# Altium PCB Panel_2020.PcbDoc
Units mm, origin at the board's own origin, x right, y up, seen from the top; angles counter-clockwise.
Board outline 100 x 189.5 mm, 4 copper layers (Top Copper, Ground Plane, Power Plane, Bottom Copper), stack 1.57 mm thick; 1 components, 344 nets, 217 pads, 0 vias.
Unrouted connection lines stored in the file: 145.
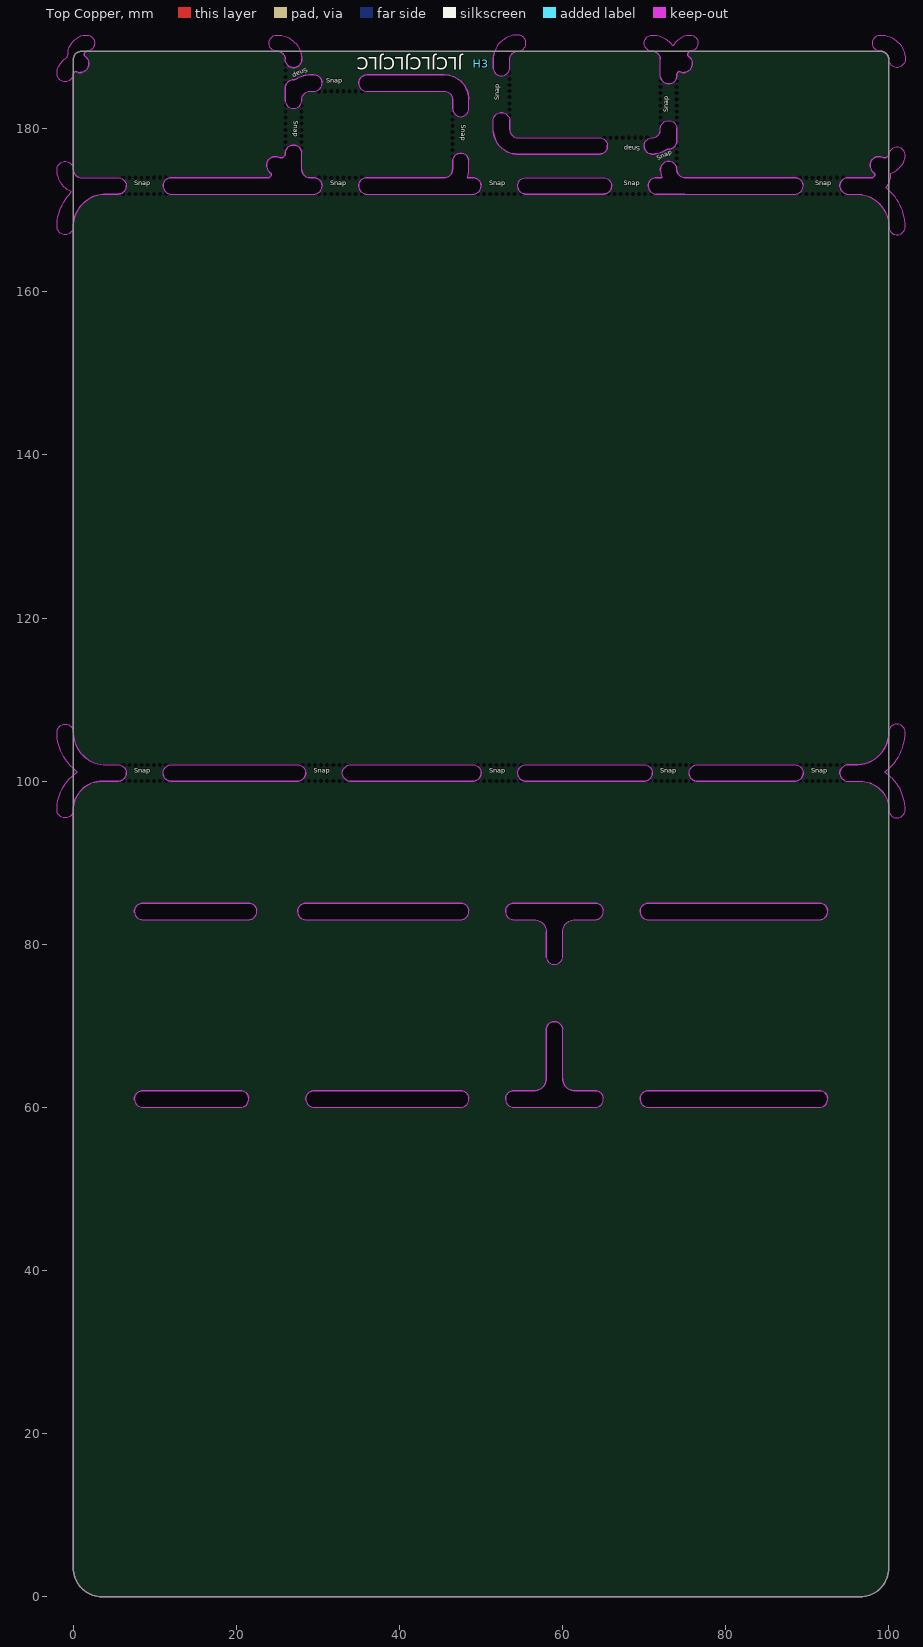
[diagram p0: Top Copper view]
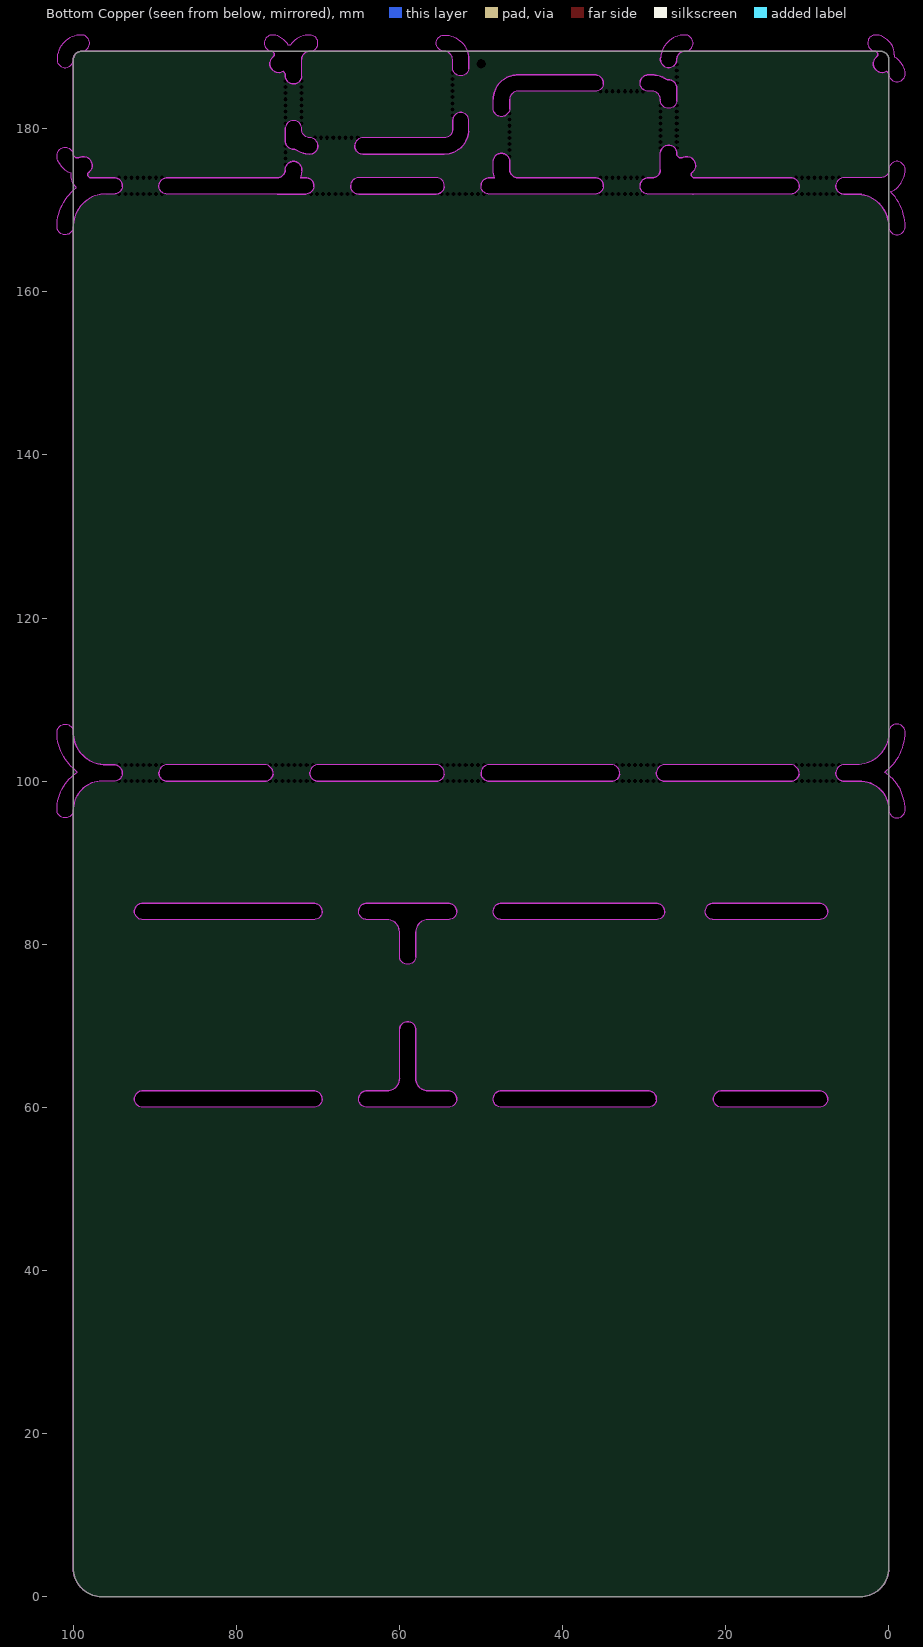
[diagram p1: Bottom Copper view, seen from below]
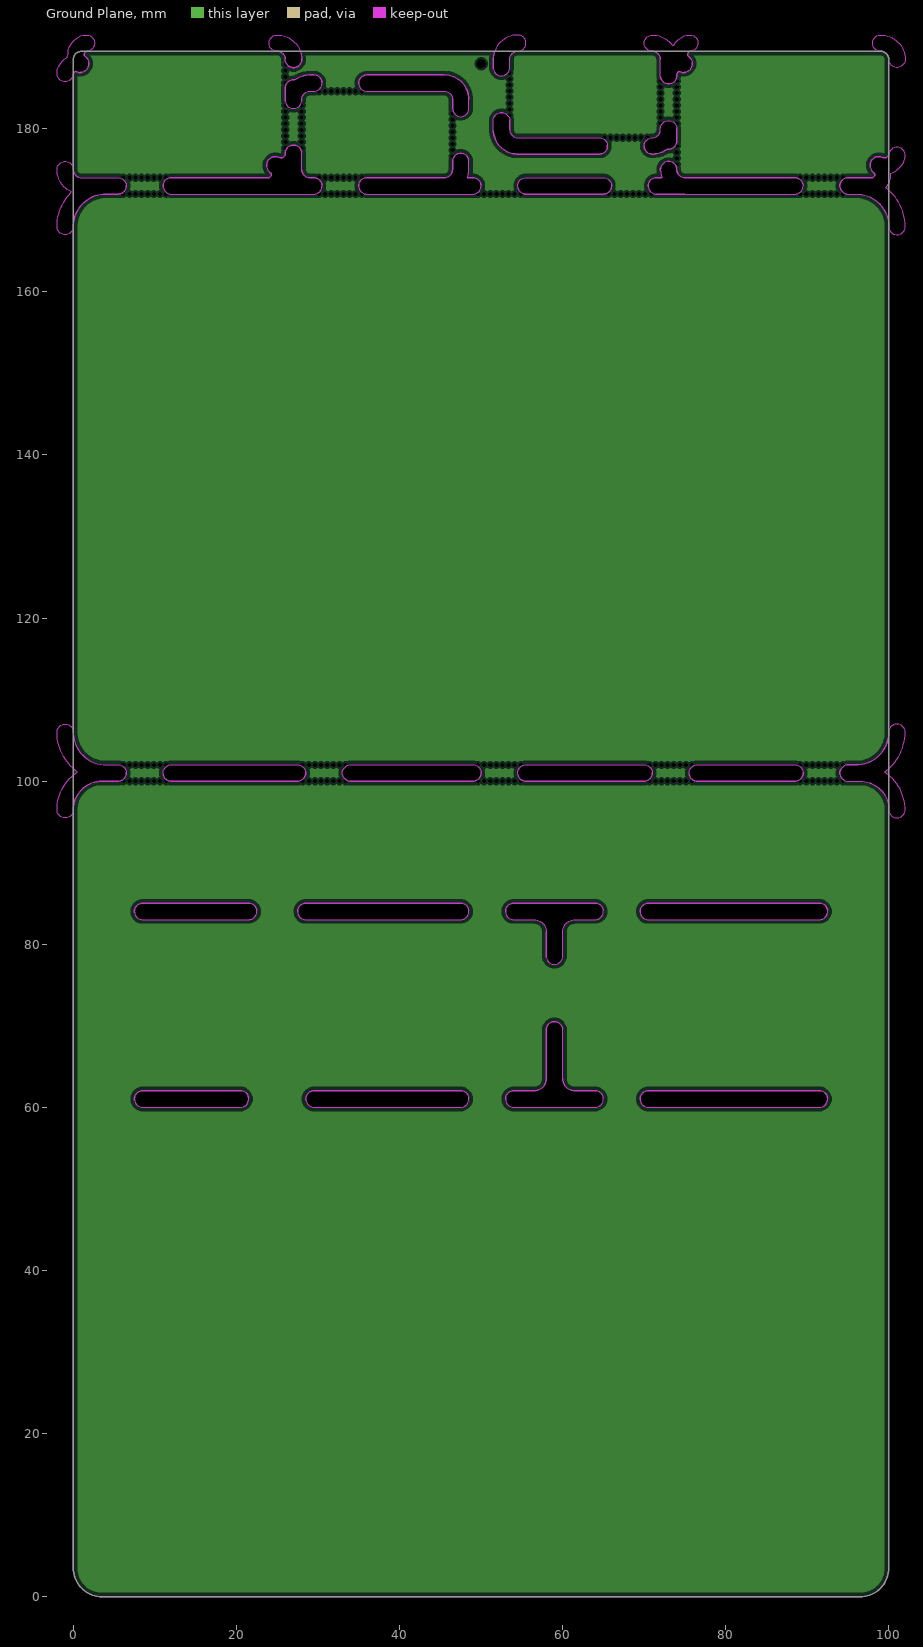
[diagram p2: Ground Plane, clearances drawn from the general rule]
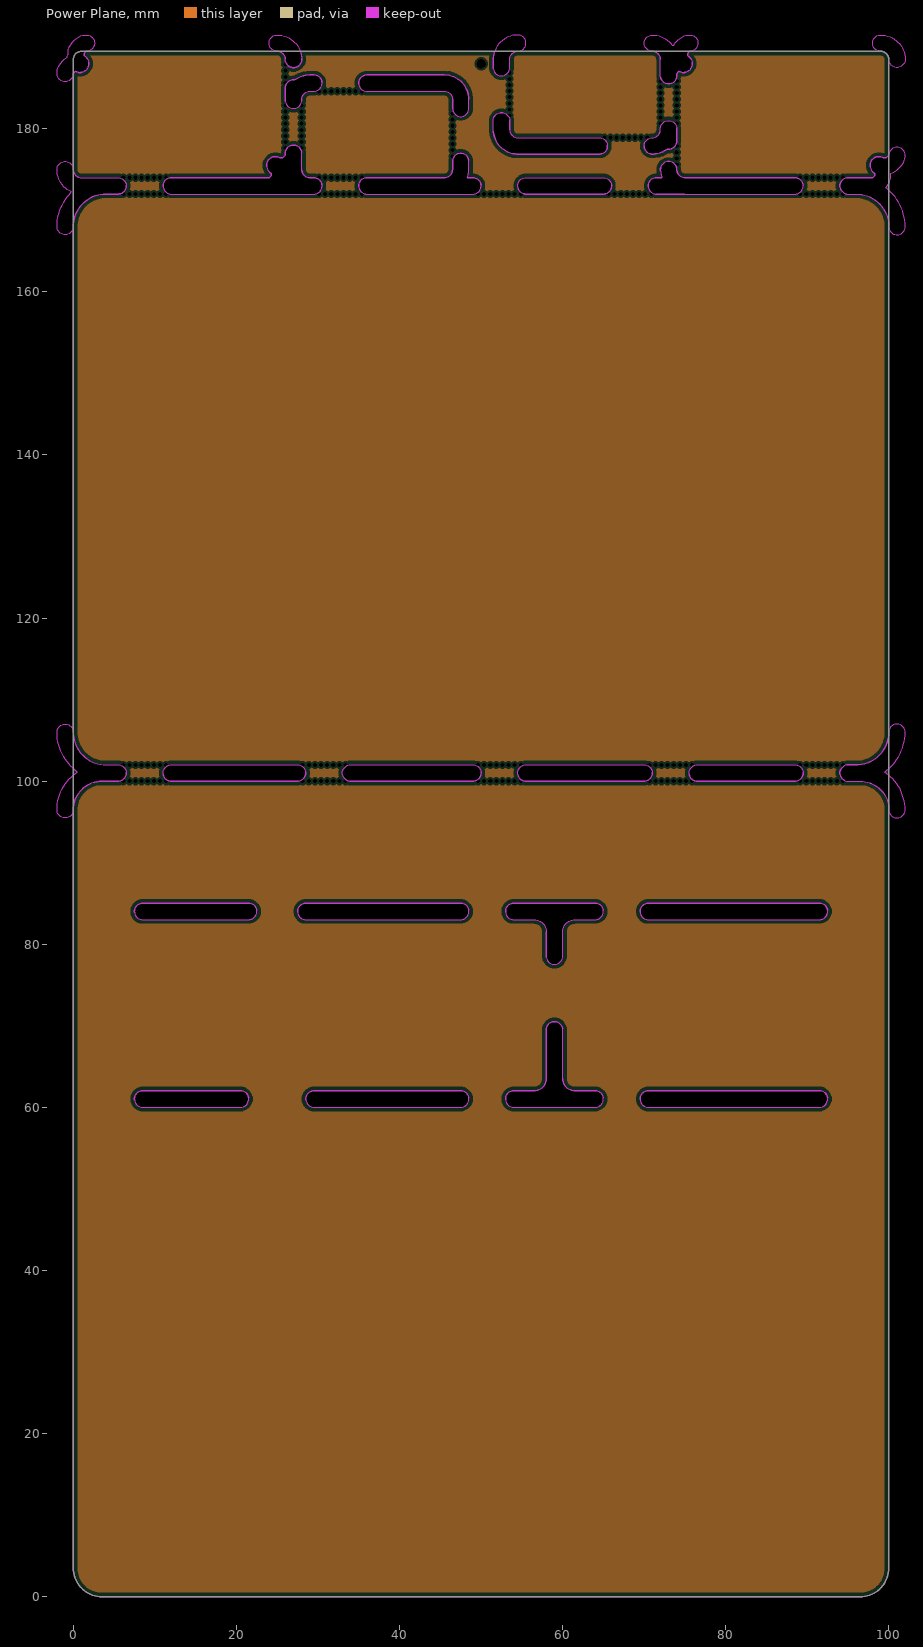
[diagram p3: Power Plane, clearances drawn from the general rule]

## Layer stack, top to bottom
Top Mask: solder mask 0.015, Solder Resist, Dk 3.8
Top Copper: signal copper 0.035
Dielectric 1: prepreg 0.2, 7628, Dk 4.6
Ground Plane: plane copper 0.0175, net GND
Core: core 1.065, FR-4, Dk 4.5
Power Plane: plane copper 0.0175, net 5L
Dielectric 2: prepreg 0.2, 7628, Dk 4.6
Bottom Copper: signal copper 0.035
Bottom Mask: solder mask 0.015, Solder Resist, Dk 3.8

## Board outline
0,3.5 0,188.5 cw(c1,188.5) 1,189.5 99,189.5 cw(c99,188.5) 100,188.5 100,3.5 cw(c96.5,3.5) 96.5,0 3.5,0 cw(c3.5,3.5)
cut-out: 55.5,100 cw(c55.5,101) 55.5,102 70,102 cw(c70,101) 71,101 cw(c70,101) 70,100
cut-out: 51.5,188.494 cw(c53.5,188.5) 51.5,188.495 cw(c53.5,188.5) 51.5,188.5 ccw(c52.5,188.5) 51.5,188.495 cw(c52.5,188.495) 51.5,188.5 51.5,187.5 ccw(c52.5,187.5) 53.5,187.5 53.5,188.5 ccw(c52.5,188.5) 53.5,188.503 cw(c54.5,188.5) 53.577,188.885 cw(c54.5,188.5) 54.495,189.5 cw(c54.5,188.5) 54.496,189.5 cw(c54.5,188.5) 54.498,189.5 cw(c54.5,188.5) 54.5,189.5 ccw(c54.5,190.5) 55.207,189.793 ccw(c54.5,190.5) 55.5,190.5 ccw(c54.5,190.5) 54.5,191.5 ccw(c54.5,188.5) 54.488,191.5 ccw(c54.5,188.5) 54.487,191.5 cw(c54.5,189.5) 54.5,191.5 54.487,191.5 ccw(c54.5,189.5) 54.484,191.5 54.487,191.5 ccw(c54.5,188.5) 51.731,189.655 ccw(c54.5,188.5) 51.5,188.5 51.5,188.495 ccw(c52.5,188.495) 51.5,188.491 cw(c53.5,188.5)
cut-out: 72,188.505 ccw(c71,188.5) 71.923,188.883 ccw(c71,188.5) 71.923,188.885 ccw(c71,188.5) 71.922,188.886 ccw(c71,188.5) 71.002,189.5 ccw(c71,188.5) 71,189.5 ccw(c71,190.5) 71.002,189.5 71,189.5 70.997,189.5 cw(c70.997,190.5) 70.994,191.5 cw(c71,189.5) 70.997,191.5 cw(c71,189.5) 71,191.5 ccw(c71,190.5) 70.997,191.5 71,191.5 cw(c71,188.5) 73.422,190.271 73.629,190.271 cw(c75.35,189.25) 73.936,190.665 73.935,190.665 74.185,190.915 74.185,190.914 cw(c75.6,189.5) 75.6,191.5 cw(c75.6,190.5) 76.6,190.5 cw(c75.6,190.5) 75.6,189.5 75.35,189.25 75.35,188.953 cw(c74.8,188) 75.357,188.949 cw(c74.8,188) 75.363,188.945 ccw(c74.851,188.086) 75.35,188.953 ccw(c74.35,188.953) 75.35,188.954 cw(c74.35,188.955) 75.35,188.953 75.35,188.954 ccw(c74.35,188.955) 75.35,188.955 cw(c74.35,188.953) 75.35,188.954 75.363,188.945 cw(c74.8,188) 75.9,188 cw(c74.8,188) 74.256,187.043 cw(c74.8,188) 74.25,187.047 ccw(c74.751,187.913) 74.256,187.043 74.25,187.047 cw(c73.485,187.691) 74.249,187.045 74.25,187.047 74.249,187.045 74,186.75 74,186.5 cw(c73,186.5) 72,186.5 72,187 cw(c73,187) 72,187.011 72,188.5 cw(c73,188.507) 72,188.502 cw(c73,188.507)
cut-out: 71,176.9 cw(c71,177.9) 70.293,178.607 cw(c71,177.9) 71,178.9 cw(c71.006,177.9) 71.001,178.9 cw(c71.006,177.9) 71.004,178.9 ccw(c71,179.9) 72,179.888 ccw(c71,179.9) 72,179.891 72,179.888 72,180 cw(c73,180) 74,180 74,178.5 cw(c73,178.5) 72.821,177.516 cw(c71,179.9) 71.01,176.9 ccw(c71,178.9) 71.011,176.9 71.01,176.9 cw(c71,179.9) 71.008,176.9 cw(c71,179.9)
cut-out: 74.98,172 ccw(c74.987,173) 74.989,172 ccw(c74.991,173) 74.991,172 cw(c74.987,173) 74.991,172 cw(c74.987,173) 74.989,172 71.5,172 88.5,172 ccw(c88.5,173) 89.5,173 ccw(c88.5,173) 88.5,174 74.998,174 74.994,174 ccw(c74.987,173) 74.993,174 cw(c75,175) 74.991,174 cw(c75,175) 74.991,174 cw(c74.991,173) 74.998,174 74.991,174 cw(c75,175) 74.991,174 cw(c75,175) 74,175 ccw(c73,175) 72,175 ccw(c75,175) 72.171,174 71.5,174 ccw(c71.5,173)
cut-out: 55.5,172 cw(c55.5,173) 55.5,174 65,174 cw(c65,173) 66,173 cw(c65,173) 65,172
cut-out: 28,183.607 cw(c29,183.6) 28,183.609 cw(c29,183.6) 28,183.61 cw(c29,183.6) 28.995,184.6 cw(c29,183.6) 28.996,184.6 cw(c29,183.6) 28.998,184.6 cw(c29,183.6) 29,184.6 ccw(c29,185.6) 29.006,184.6 29,184.6 cw(c28.992,185.6) 28.998,184.6 cw(c28.992,185.6) 28.995,184.6 29,184.6 29.5,184.6 ccw(c29.5,185.6) 30.5,185.6 ccw(c29.5,185.6) 29.5,186.6 29,186.6 ccw(c29,185.6) 28.993,186.6 cw(c29,183.6) 29,186.6 ccw(c29,184.6) 28.987,186.6 cw(c29,183.6) 28.988,186.6 cw(c29,183.6) 28.993,186.6 ccw(c29,185.6) 28.992,186.6 ccw(c28.992,185.6) 28.988,186.6 28.987,186.6 ccw(c29,184.6) 28.984,186.6 28.987,186.6 ccw(c29,183.6) 27.179,185.984 ccw(c27,185) 26,185 26,183.5 ccw(c27,183.5) 28,183.5
cut-out: 36,184.6 45.5,184.6 ccw(c45.5,185.6) 45.502,184.6 ccw(c45.5,183.6) 45.5,184.6 cw(c45.5,185.6) 45.497,184.6 ccw(c45.497,185.6) 45.5,184.6 45.502,184.6 cw(c45.5,183.6) 46.5,183.605 cw(c45.5,183.6) 46.5,183.604 cw(c45.5,183.6) 46.5,183.602 cw(c45.5,183.6) 46.5,183.6 ccw(c47.5,183.6) 46.5,183.595 46.5,183.6 cw(c47.5,183.607) 46.5,183.602 cw(c47.5,183.607) 46.5,183.605 46.5,183.6 46.5,182.5 ccw(c47.5,182.5) 48.5,182.5 48.5,183.6 ccw(c47.5,183.6) 48.5,183.606 ccw(c45.5,183.6) 48.5,183.611 cw(c47.5,183.607) 48.5,183.607 cw(c47.5,183.6) 48.5,183.606 cw(c45.5,183.6) 48.5,183.6 ccw(c46.5,183.6) 48.5,183.612 cw(c45.5,183.6) 48.5,183.611 48.5,183.612 ccw(c46.5,183.6) 48.5,183.614 48.5,183.612 ccw(c45.5,183.6) 45.5,186.6 ccw(c45.5,184.6) 45.497,186.6 ccw(c45.5,184.6) 45.495,186.6 ccw(c45.5,184.6) 45.494,186.6 cw(c45.497,185.6) 45.497,186.6 cw(c45.5,185.6) 45.5,186.6 36,186.6 ccw(c36,185.6)
cut-out: 54.496,178.9 ccw(c54.5,179.9) 54.5,178.9 ccw(c54.5,179.9) 54.5,178.9 ccw(c54.505,177.9) 54.5,178.9 64.5,178.9 cw(c64.5,177.9) 65.5,177.9 cw(c64.5,177.9) 64.5,176.9 54.5,176.9 ccw(c54.505,177.9) 54.505,176.9 cw(c54.5,177.9) 54.5,176.9 ccw(c54.5,178.9) 54.505,176.9 ccw(c54.5,178.9) 54.507,176.9 ccw(c54.5,178.9) 54.51,176.9 54.5,176.9 cw(c54.5,179.9) 51.5,179.9 51.5,181 cw(c52.5,181) 53.5,181 53.5,179.9 ccw(c54.5,179.9)
cut-out: 45.497,172 ccw(c45.5,173) 45.5,172 ccw(c45.5,175) 45.508,172 ccw(c45.506,173) 45.51,172 ccw(c45.5,175) 45.512,172 ccw(c45.5,175) 45.514,172 cw(c45.51,173) 45.511,172 ccw(c45.5,174) 45.516,172 45.512,172 49,172 ccw(c49,173) 50,173 ccw(c49,173) 49,174 48.329,174 ccw(c45.5,175) 48.5,175 48.5,176 ccw(c47.5,176) 46.5,176 46.5,175 ccw(c47.5,175) 46.5,174.997 ccw(c45.5,175) 46.5,175 cw(c47.5,175.005) 46.5,175.005 ccw(c47.5,175) 46.5,175 46.5,174.997 cw(c45.5,175) 45.51,174 cw(c45.5,175) 45.508,174 cw(c45.5,175) 45.507,174 cw(c45.5,175) 45.505,174 cw(c45.51,173) 45.508,174 cw(c45.51,173) 45.509,174 cw(c45.51,173) 45.51,174 45.508,174 cw(c45.508,173) 45.509,174 cw(c45.508,173) 45.51,174 ccw(c45.506,173) 45.504,174 ccw(c45.506,173) 45.504,174 cw(c45.51,173) 45.505,174 cw(c45.5,175) 45.504,174 cw(c45.5,175) 45.503,174 cw(c45.5,175) 45.502,174 cw(c45.5,173) 45.502,174 cw(c45.506,173) 45.503,174 cw(c45.506,173) 45.504,174 ccw(c45.51,173) 45.503,174 ccw(c45.5,173) 45.502,174 ccw(c45.506,173) 45.501,174 ccw(c45.506,173) 45.5,174 cw(c45.508,173) 45.501,174 cw(c45.508,173) 45.502,174 cw(c45.508,173) 45.507,174 cw(c45.508,173) 45.508,174 45.502,174 ccw(c45.5,173) 45.502,174 ccw(c45.5,173) 45.5,174 36,174 ccw(c36,173) 36,172 45.5,172 ccw(c45.5,173) 45.503,172 ccw(c45.5,173) 45.506,172 ccw(c45.5,173) 45.507,172 ccw(c45.51,173) 45.508,172 ccw(c45.51,173) 45.51,172 ccw(c45.51,173) 45.511,172 cw(c45.506,173) 45.511,172 cw(c45.506,173) 45.51,172 cw(c45.5,175) 45.508,172 cw(c45.5,175) 45.508,172 cw(c45.506,173) 45.503,172 cw(c45.506,173) 45.5,172 45.506,172 ccw(c45.508,173) 45.508,172 45.512,172 45.511,172 cw(c45.5,174) 45.511,172 ccw(c45.51,173) 45.511,172 45.51,172 cw(c45.5,173) 45.508,172 cw(c45.5,173)
cut-out: 12,172 24,172 ccw(c24,173) 24.009,172 ccw(c24.009,173) 24.017,172 24.009,172 cw(c24.009,173) 24.009,172 28.991,172 ccw(c28.991,173) 28.993,172 ccw(c29,173) 29,172 29.5,172 ccw(c29.5,173) 30.5,173 ccw(c29.5,173) 29.5,174 29,174 ccw(c29,173) 28.997,174 ccw(c28.991,173) 28.991,174 ccw(c29,175) 28.992,174 ccw(c29,175) 28.993,174 28.995,174 cw(c29,173) 28.997,174 28.995,174 ccw(c28.987,173) 28.992,174 ccw(c28.987,173) 28.991,174 ccw(c28.987,173) 28.987,174 28.991,174 cw(c29,175) 28.987,174 cw(c29,175) 28,175 28,176.741 28,177 ccw(c27,177) 26,177 26,176.75 25.702,176.453 25.35,176.453 ccw(c24.849,175.587) 25.35,176.453 cw(c24.85,175.587) 25.35,176.453 ccw(c24.8,175.5) 25.35,176.453 ccw(c24.8,175.5) 25.344,176.457 cw(c24.849,175.587) 25.35,176.453 ccw(c25.35,175.453) 25.35,176.453 25.344,176.457 ccw(c24.8,175.5) 24.237,174.555 ccw(c24.8,175.5) 24.243,174.551 ccw(c24.8,175.5) 24.25,174.547 cw(c24.749,175.414) 24.237,174.555 24.248,174.548 ccw(c24.75,175.413) 24.25,174.547 24.25,174.25 24,174 ccw(c24.009,173) 24,174 12,174 ccw(c12,173)
cut-out: 76.5,100 cw(c76.5,101) 76.5,102 88.5,102 cw(c88.5,101) 89.5,101 cw(c88.5,101) 88.5,100
cut-out: 34,100 cw(c34,101) 34,102 49,102 cw(c49,101) 50,101 cw(c49,101) 49,100
cut-out: 12,100 cw(c12,101) 12,102 27.5,102 cw(c27.5,101) 28.5,101 cw(c27.5,101) 27.5,100
cut-out: -2,96.5 cw(c3.5,96.5) -0.497,100.279 cw(c3.5,96.5) 0.512,101.118 cw(c4,106) -0.524,102.059 cw(c4,106) -2,105.996 cw(c0,106) -2,106 cw(c-1,106) -0.293,106.707 cw(c-1,106) 0,106 cw(c-1,105.997) 0,105.998 cw(c4,106) 0,106 0,105.998 cw(c-1,105.997) 0,105.997 0,105.998 ccw(c4,106) 0.983,103.374 ccw(c4,106) 0.984,103.373 ccw(c4,106) 0.986,103.371 ccw(c4,106) 3.979,102 ccw(c4,106) 3.982,102 3.979,102 5.5,102 cw(c5.5,101) 6.5,101 cw(c5.5,101) 5.5,100 3.5,100 ccw(c3.5,96.5) 0.958,98.906 cw(c0.23,99.591) 0.957,98.904 cw(c3.5,96.5) 0.958,98.906 0.957,98.904 ccw(c3.5,96.5) 0.955,98.903 ccw(c3.5,96.5) 0,96.5 cw(c-1,96.5)
cut-out: 95,100 96.5,100 cw(c96.5,96.5) 99.042,98.906 cw(c96.5,96.5) 99.043,98.904 cw(c99.77,99.591) 99.042,98.906 99.043,98.904 ccw(c99.77,99.591) 99.045,98.903 cw(c96.5,96.5) 100,96.5 ccw(c101,96.5) 102,96.5 ccw(c96.5,96.5) 100.497,100.279 ccw(c96.5,96.5) 99.488,101.118 ccw(c96,106) 100.524,102.059 ccw(c96,106) 102,105.996 ccw(c100,106) 102,106 cw(c96,106) 102,105.997 cw(c96,106) 102,105.996 cw(c100,106) 102,105.995 ccw(c101,105.997) 102,105.997 ccw(c101,105.997) 102,105.997 102,106 ccw(c101,106) 100.293,106.707 ccw(c101,106) 100,106 cw(c96,106) 100,105.998 cw(c101,105.997) 100,106 100,105.998 cw(c96,106) 99.017,103.374 cw(c96,106) 99.016,103.373 cw(c99.77,102.716) 99.017,103.374 99.016,103.373 cw(c96,106) 99.014,103.371 cw(c96,106) 96.021,102 cw(c96,106) 96.018,102 96.021,102 95,102 ccw(c95,101)
cut-out: 99,189.5 cw(c99,190.5) 99,191.5 cw(c99,188.5) 102,188.5 cw(c101,188.5) 100,188.5 ccw(c99,188.5)
cut-out: 95,172 96.02,172 cw(c96.02,173) 96.02,172 cw(c96.02,173) 96.016,172 cw(c96,168) 96.018,172 cw(c96,168) 99.014,170.629 cw(c96,168) 99.016,170.627 cw(c99.77,171.284) 99.015,170.629 99.016,170.627 cw(c96,168) 99.017,170.626 cw(c96,168) 100,168.002 cw(c96,168) 100,168 ccw(c101,168) 100.293,167.293 ccw(c101,168) 102,168 ccw(c100,168) 102,168.004 cw(c96,168) 102,168.003 ccw(c101,168.003) 102,168.005 cw(c100,168) 102,168.004 ccw(c96,168) 100.524,171.941 ccw(c96,168) 99.617,172.788 99.665,172.835 99.664,172.835 ccw(c98.25,174.25) 100.25,174.25 100.25,174.529 ccw(c99.703,176.453) 101.117,175.038 101.415,175.335 101.414,175.335 ccw(c100,176.75) 102,176.75 ccw(c101,176.75) 100,176.75 99.702,176.453 99.35,176.453 cw(c99.35,175.453) 99.35,176.453 cw(c98.85,175.587) 99.35,176.453 ccw(c98.849,175.587) 99.35,176.453 ccw(c98.849,175.587) 99.344,176.457 cw(c98.8,175.5) 99.35,176.453 cw(c98.8,175.5) 99.35,176.453 99.344,176.457 ccw(c98.8,175.5) 98.237,174.555 ccw(c98.749,175.414) 98.25,174.547 cw(c98.8,175.5) 98.243,174.551 cw(c98.8,175.5) 98.237,174.555 98.248,174.548 ccw(c98.75,175.413) 98.25,174.547 98.25,174.25 98,174 95,174 ccw(c95,173)
cut-out: 25,189.5 cw(c25,190.5) 25,191.5 cw(c25,188.5) 27.769,189.655 cw(c25,188.5) 28,188.5 cw(c27,188.5) 26,188.5 ccw(c25,188.5) 25.923,188.883 ccw(c25,188.5) 25.923,188.885 ccw(c25,188.5) 25.922,188.886 ccw(c26.846,189.27) 25.923,188.885 ccw(c26.846,189.27) 25.923,188.883 25.922,188.886 ccw(c25,188.5)
cut-out: -2,186.75 cw(c0,186.75) -1.531,188.037 -1.281,188.335 cw(c0.25,187.047) -0.749,188.78 cw(c0.25,187.047) -0.749,188.78 -0.722,188.918 -0.722,188.92 cw(c0.259,188.725) -0.665,189.108 -0.65,189.142 -0.65,189.25 cw(c1.35,189.25) -0.064,190.665 -0.065,190.665 0.185,190.915 0.185,190.914 cw(c1.6,189.5) 1.6,191.5 cw(c1.6,190.5) 2.6,190.5 cw(c1.6,190.5) 1.6,189.5 1.35,189.25 1.35,188.953 cw(c0.8,188) 1.357,188.949 cw(c0.8,188) 1.363,188.945 cw(c0.8,188) 1.9,188 cw(c0.8,188) 0.256,187.043 cw(c0.8,188) 0.25,187.047 ccw(c0.751,187.913) 0.256,187.043 0.25,187.047 cw(c-0.515,187.691) 0.249,187.045 0.25,187.047 0.249,187.045 0,186.75 cw(c-1,186.75)
cut-out: -1,167 cw(c-1,168) -2,168 cw(c0,168) -2,168.004 cw(c4,168) -0.524,171.941 cw(c4,168) -0.225,172.261 cw(c1,175) -2,175 cw(c-1,175) 0,175 ccw(c1,175) 0.614,174.078 ccw(c1,175) 0.615,174.077 ccw(c1,175) 0.617,174.077 ccw(c1,175) 0.998,174 cw(c1,173) 1,174 5.5,174 cw(c5.5,173) 6.5,173 cw(c5.5,173) 5.5,172 3.978,172 ccw(c3.978,173) 3.98,172 cw(c4,168) 3.982,172 3.98,172 ccw(c4,168) 3.98,172 ccw(c4,168) 0.986,170.629 ccw(c4,168) 0.984,170.627 ccw(c0.23,171.284) 0.986,170.629 0.984,170.627 cw(c0.23,171.284) 0.983,170.626 cw(c4,168) 0.984,170.627 0.983,170.626 ccw(c4,168) 0,168.002 ccw(c-1,168.003) 0,168.003 0,168.002 ccw(c4,168) 0,168 ccw(c-1,168.003) 0,168.002 0,168 cw(c-1,168)
cut-out: 91.5,83.029 ccw(c91.5,84.029) 91.5,85.029 70.5,85.029 ccw(c70.5,84.029) 69.5,84.029 ccw(c70.5,84.029) 70.5,83.029
cut-out: 47.5,83.029 ccw(c47.5,84.029) 47.5,85.029 28.5,85.029 ccw(c28.5,84.029) 27.5,84.029 ccw(c28.5,84.029) 28.5,83.029
cut-out: 20.5,60.029 ccw(c20.5,61.029) 20.5,62.029 8.5,62.029 ccw(c8.5,61.029) 7.5,61.029 ccw(c8.5,61.029) 8.5,60.029
cut-out: 21.5,83.029 ccw(c21.5,84.029) 21.5,85.029 8.5,85.029 ccw(c8.5,84.029) 7.5,84.029 ccw(c8.5,84.029) 8.5,83.029
cut-out: 60,81.529 cw(c61.5,81.529) 61.5,83.029 64,83.029 ccw(c64,84.029) 64,85.029 54,85.029 ccw(c54,84.029) 53,84.029 ccw(c54,84.029) 54,83.029 56.5,83.029 cw(c56.5,81.529) 58,81.529 58,78.529 ccw(c59,78.529) 60,78.529
cut-out: 91.5,60.029 ccw(c91.5,61.029) 91.5,62.029 70.5,62.029 ccw(c70.5,61.029) 69.5,61.029 ccw(c70.5,61.029) 70.5,60.029
cut-out: 47.5,60.029 ccw(c47.5,61.029) 47.5,62.029 29.5,62.029 ccw(c29.5,61.029) 28.5,61.029 ccw(c29.5,61.029) 29.5,60.029
cut-out: 64,60.029 ccw(c64,61.029) 64,62.029 61.5,62.029 cw(c61.5,63.529) 60,63.529 60,69.529 ccw(c59,69.529) 58,69.529 58,63.529 cw(c56.5,63.529) 56.5,62.029 54,62.029 ccw(c54,61.029) 53,61.029 ccw(c54,61.029) 54,60.029

## Design rules (kind name [scope] priority, off if disabled: settings)
AssemblyTestPointUsage [All] p1 off:
AssemblyTestpoint [All] p1 off: testpointundercomponent=TRUE minsize=1.016 maxsize=2.54 preferedsize=1.524 minholesize=0 maxholesize=1.016 preferedholesize=0.813 testpointgrid=0.025 usegrid=TRUE gridtolerance=0 allowsidetop=TRUE allowsidebottom=TRUE
BoardOutlineClearance [All] p1: gap=0.2 ignorepadtopadclearanceinfootprint=FALSE
Clearance Clearance_Outer_layer [OnLayer('Component Side') or OnLayer('Solder Side')] p1: gap=0.127 ignorepadtopadclearanceinfootprint=FALSE except(0.09: Arc-Arc Arc-Track Track-Track; 0.2: Arc-SMDPad Track-SMDPad; 0.254: Arc-Hole Track-Hole SMDPad-Hole THPad-Hole Via-Hole Fill-Hole Poly-Hole Region-Hole Text-Hole; 0.33: Arc-THPad Track-THPad SMDPad-THPad; 0.54: THPad-THPad)
Clearance Clearance_Inner_layer [All] p2: gap=0.127 ignorepadtopadclearanceinfootprint=FALSE except(0.2: Arc-SMDPad Track-SMDPad; 0.254: Arc-Hole Track-Hole SMDPad-Hole THPad-Hole Via-Hole Fill-Hole Poly-Hole Region-Hole Text-Hole; 0.33: Arc-THPad Track-THPad SMDPad-THPad; 0.54: THPad-THPad)
ComponentClearance [IsComponent and (not (InComponent('J202') or InComponent('J204'))) vs IsComponent and (not (InComponent('J201') or InComponent('J203')))] p1: gap=0.2 collisioncheckmode=3 verticalgap=2540 showdistances=FALSE
DiffPairsRouting [All] p1 off: maxlimit=0.254 minlimit=0.254 mostfreqgap=0.254 toplayer_minwidth=0.381 toplayer_maxwidth=0.381 toplayer_prefwidth=0.381 bottomlayer_minwidth=0.381 bottomlayer_maxwidth=0.381 bottomlayer_prefwidth=0.381 maxuncoupledlength=12.7
FabricationTestPointUsage TestPointUsage [All] p1 off: valid=0 allowmultiple=FALSE
FabricationTestpoint Testpoint [All] p1 off: side=3 testpointundercomponent=TRUE minsize=1.016 maxsize=2.54 preferedsize=1.524 minholesize=0 maxholesize=1.016 preferedholesize=0.813 testpointgrid=0.025 allowsidetop=TRUE allowsidebottom=TRUE usegrid=TRUE gridtolerance=0
FanoutControl Fanout_BGA [IsBGA] p1 off: bgadir=Out bgaviamode=Centered fanoutstyle=Auto fanoutdirection=Alternating viagrid=0.025 // Fanout_BGA (Default Rule)
FanoutControl Fanout_LCC [IsLCC] p2 off: bgadir=Out bgaviamode=Centered fanoutstyle=Auto fanoutdirection=Alternating viagrid=0.025 // Fanout_LCC (Default Rule)
FanoutControl Fanout_SOIC [IsSOIC] p3 off: bgadir=Out bgaviamode=Centered fanoutstyle=Auto fanoutdirection=Alternating viagrid=0.025 // Fanout_SOIC (Default Rule)
FanoutControl Fanout_Small [(CompPinCount < 5)] p4 off: bgadir=Out bgaviamode=Centered fanoutstyle=Auto fanoutdirection=OutThenIn viagrid=0.025 // Fanout_Small (Default Rule)
FanoutControl Fanout_Default [All] p5 off: bgadir=Out bgaviamode=Centered fanoutstyle=Auto fanoutdirection=Alternating viagrid=0.025 // Fanout_Default (Default Rule)
HoleSize [All] p1: absolutevalues=TRUE maxlimit=6.3 minlimit=0.2 maxpercent=80.000 minpercent=20.000
HoleToHoleClearance ViaToViaClearance [IsVia vs IsVia] p1: gap=0.254 allowstackedmicrovias=TRUE
HoleToHoleClearance [All] p2: gap=0.54 allowstackedmicrovias=TRUE
MinimumAnnularRing [All] p1: minimumring=0.13
MinimumSolderMaskSliver [All] p1: minsoldermaskwidth=0.075
NetAntennae NetAntenna [All] p1: netantennaetolerance=0
PlaneClearance [All] p1: clearance=0.254
PlaneConnect [All] p1: planeconnectstyle=Direct reliefexpansion=0.3 reliefentries=4 reliefconductorwidth=0.3 reliefairgap=0.2
PolygonConnect [All] p1: thpad.connectstyle=Relief thpad.reliefconductorwidth=0.2 thpad.reliefentries=4 thpad.polygonreliefangle="90 Angle" thpad.airgapwidth=0.254 smdpad.connectstyle=Relief smdpad.reliefconductorwidth=0.2 smdpad.reliefentries=4 smdpad.polygonreliefangle="90 Angle" smdpad.airgapwidth=0.254 via.connectstyle=Direct via.reliefconductorwidth=0.2 via.reliefentries=4 via.polygonreliefangle="90 Angle" via.airgapwidth=0.254
RoutingVias [All] p1: holewidth=0.2 width=0.5 viastyle="Through Hole" minholewidth=0.2 minwidth=0.45 maxholewidth=0.3 maxwidth=0.9
SMDEntry [All] p1: side=TRUE corner=TRUE anyangle=TRUE
SilkToSilkClearance [All] p1 off: silktosilkclearance=0.15
SilkToSolderMaskClearance [IsPad] p1: minsilkscreentomaskgap=0.15 clearancetoexposedcopper=TRUE
SolderMaskExpansion [All] p1: expansion=0.05 istentingtop=FALSE
Width Width_Outer_Layer [OnLayer('Component Side') or OnLayer('Solder Side')] p1: maxlimit=3 minlimit=0.09 preferedwidth=0.15
Width Width_Inner_Layer [All] p2: maxlimit=3 minlimit=0.127 preferedwidth=0.15
11 further rules are at their usual default settings.

## Classes and differential pairs
net class NET_ANALOG: ADC_IN_1 ADC_IN_2 ANALOG_IN0 ANALOG_IN1 ANALOG_IN2 ANALOG_IN3 ANALOG_IN4 ANALOG_IN5 ANALOG_IN6 ANALOG_IN7 MOT1_CS MOT2_CS Servo_Curr_1 Servo_Curr_2 Servo_Curr_3 Servo_Curr_4
net class NET_POWER: 3L 3L_ADC 3L_CAP 3L_FT232 3L_MOT 5L 5L_CAP 5L_DE0 5L_DYNA 5L_ENC_PROP 5L_EXT_1 5L_EXT_2 5L_EXT_3 5L_EXT_4 5L_QEI_MOT 5L_QEI_PROP 5P 5P_SERVO_B 5P_SERVO_C +3V3 +5V CAP_#A CAP_#B CAP_#C E5V GND PWR_Servo_1 PWR_Servo_2 PWR_Servo_3 PWR_Servo_4 U5V VBAT VCC_EXT_1 VCC_EXT_2 VDD VIN VUSB
net class USB: 3L 3L_FT232 3V3_FT232 FT232_Rx FT232_Tx GND GPIO_032_D12 GPIO_033_B12 NetD203_1 NetD203_2 NetD204_1 NetD204_2 NetJ207_4 NetU200_2 NetU200_3 NetU200_6 NetU200_9 NetU200_10 NetU200_11 NetU200_12 NetU200_13 NetU200_14 NetU200_19 NetU200_27 NetU200_28 PC10 PC11 USB_N USB_P VUSB
net class CAPT_TOF: 5L GND GPIO_011_A6 GPIO_013_D6 GPIO_21_B16 GPIO_22_C14 GPIO_23_C16 GPIO_24_C15 I2C1_SCL I2C1_SDA PA15 PB7 ToF_DS_1 ToF_DS_2 ToF_DS_3 ToF_DS_4
net class SERVO: 5P 5P_SERVO_B 5P_SERVO_C GND GPIO_022_F9 GPIO_023_E9 GPIO_024_C9 GPIO_025_D9 GPIO_028_C11 GPIO_029_B11 GPIO_030_A12 GPIO_031_D11 Servo_5 Servo_6 Servo_7 Servo_8 Servo_9 Servo_10 Servo_11 Servo_12
net class SERVO_SENSE: 5P 5P_SERVO_A GND GPIO_018_E7 GPIO_019_D8 GPIO_020_E8 GPIO_021_F8 PWR_Servo_1 PWR_Servo_2 PWR_Servo_3 PWR_Servo_4 Servo_1 Servo_2 Servo_3 Servo_4
net class SERVO_CURR: 5P_SERVO_A ANALOG_IN3 ANALOG_IN5 ANALOG_IN6 ANALOG_IN7 GND PWR_Servo_1 PWR_Servo_2 PWR_Servo_3 PWR_Servo_4 Servo_Curr_1 Servo_Curr_2 Servo_Curr_3 Servo_Curr_4
net class NUCLEO: +3V3 +5V AVDD BOOT0 E5V GND NetJ221_9 NetJ221_25 NetJ221_33 NetJ221_39 NetJ221_40 NetJ222_39 NetJ222_40 NRST PA0 PA1 PA2 PA3 PA4 PA8 PA9 PA10 PA11 PA12 PA13 PA14 PA15 PB0 PB1 PB1_SPARE PB2 PB3 PB4 PB5 PB6 PB7 PB8 PB9 PB10 PB11 PB12 PB13 PB14 PB15 PC0 PC1 PC2 PC3 PC4 PC5 PC6 PC7 PC8 PC9 PC10 PC11 PC12 PC13 PC14 PC15 PD2 PD8 PF0 PF1 PF4 PF5 PF6 PF7 SPI1_MISO SPI1_MOSI SPI1_SCK U5V VBAT VDD VIN
net class MOT_PROP: GND GPIO_118_R16 GPIO_120_P15 GPIO_121_P16 GPIO_122_R14 GPIO_123_N16 PA11 PB6 PB10 PB11 PC7 PROP_DIR1 PROP_DIR2 PROP_EN PROP_S1-Rx PROP_S2-Tx
net class MOT_ACT: 3L_MOT ANALOG_IN0 ANALOG_IN1 GND GPIO_18_T10 GPIO_19_R11 GPIO_110_P11 GPIO_111_R10 MOT1_CS MOT1_DIR MOT1_PWM MOT2_CS MOT2_DIR MOT2_PWM
net class GYRO: 5L GND GPIO_124_N15 GPIO_125_P14 GPIO_126_L14 GPIO_127_N14 PB12 PB13 PB14 PB15 SPI2_CS_1 SPI2_MISO SPI2_MOSI SPI2_SCK
net class GPIO+ADC: 3L_ADC 5L ADC_IN_1 ADC_IN_2 ANALOG_IN2 ANALOG_IN4 EXT_IO_1 EXT_IO_2 EXT_IO_3 EXT_IO_4 EXT_IO_5 EXT_IO_6 EXT_IO_7 EXT_IO_8 EXT_IO_9 EXT_IO_10 GND GPIO_00_D3 GPIO_01_C3 GPIO_02_A2 GPIO_03_A3 GPIO_04_B3 GPIO_05_B4 GPIO_06_A4 GPIO_07_B5 GPIO_08_A5 GPIO_09_D5 PA4 PB0 PC0 PC1 PC2 PF1 VCC_EXT_1 VCC_EXT_2
net class EXT_BUS: 5L FPGA_Rx FPGA_Tx GND GPIO_010_B6 GPIO_012_B7 GPIO_014_A7 GPIO_015_C6 GPIO_016_C8 GPIO_017_E6 GPIO_026_E11 GPIO_027_E10 I2C2_SCL I2C2_SDA PC12 PD2 SPI3_CS_1 SPI3_MISO SPI3_MOSI SPI3_SCK STM_Rx STM_Tx
net class ENC_SSI: 5L 5L_QEI_PROP ENC_M1_CLK1 ENC_M1_CLK2 ENC_M1_DAT1 ENC_M1_DAT2 ENC_M2_CLK1 ENC_M2_CLK2 ENC_M2_DAT1 ENC_M2_DAT2 GND GPIO_0_IN0_A8 GPIO_0_IN1_B8 GPIO_25_D16 GPIO_26_D15 GPIO_27_D14 GPIO_28_F15 GPIO_132_J13 GPIO_133_J14 SSI_M1_CLK1 SSI_M1_CLK2 SSI_M1_DAT1 SSI_M1_DAT2 SSI_M2_CLK1 SSI_M2_CLK2 SSI_M2_DAT1 SSI_M2_DAT2
net class ENC_ODO: 5L 5L_ENC_PROP ENC_P1_A ENC_P1_B ENC_P2_A ENC_P2_B GND GPIO_128_M10 GPIO_129_L13 GPIO_130_J16 GPIO_131_K15 PA8 PA9 PB4 PB5 QEI_P1_A QEI_P1_B QEI_P2_A QEI_P2_B
net class ENC_ACT: 5L 5L_QEI_MOT ENC_M1_A ENC_M1_B ENC_M2_A ENC_M2_B GND GPIO_112_N12 GPIO_113_P9 GPIO_114_N9 GPIO_115_N11 QEI_M1_A QEI_M1_B QEI_M2_A QEI_M2_B
net class DYNAMIXEL: 5L_DYNA DATA_DYNA DYNA_DIR DYNA_RX DYNA_TX GND nDATA_DYNA NetJ240_2 PA10 PC3 PC4
net class DE0: ANALOG_IN0 ANALOG_IN1 ANALOG_IN2 ANALOG_IN3 ANALOG_IN4 ANALOG_IN5 ANALOG_IN6 ANALOG_IN7 GND GPIO_00_D3 GPIO_0_IN0_A8 GPIO_0_IN1_B8 GPIO_01_C3 GPIO_1_IN0_T9 GPIO_1_IN1_R9 GPIO_02_A2 GPIO_2_IN0_E15 GPIO_2_IN1_E16 GPIO_2_IN2_M16 GPIO_03_A3 GPIO_04_B3 GPIO_05_B4 GPIO_06_A4 GPIO_07_B5 GPIO_08_A5 GPIO_09_D5 GPIO_010_B6 GPIO_10_F13 GPIO_011_A6 GPIO_11_T15 GPIO_012_B7 GPIO_12_T14 GPIO_013_D6 GPIO_13_T13 GPIO_014_A7 GPIO_14_R13 GPIO_015_C6 GPIO_15_T12 GPIO_016_C8 GPIO_16_R12 GPIO_017_E6 GPIO_018_E7 GPIO_18_T10 GPIO_019_D8 GPIO_19_R11 GPIO_20_A14 GPIO_020_E8 GPIO_21_B16 GPIO_021_F8 GPIO_22_C14 GPIO_022_F9 GPIO_23_C16 GPIO_023_E9 GPIO_024_C9 GPIO_24_C15 GPIO_025_D9 GPIO_25_D16 GPIO_26_D15 GPIO_026_E11 GPIO_27_D14 GPIO_027_E10 GPIO_028_C11 GPIO_28_F15 GPIO_029_B11 GPIO_29_F16 GPIO_030_A12 GPIO_031_D11 GPIO_032_D12 GPIO_033_B12 GPIO_110_P11 GPIO_111_R10 GPIO_112_N12 GPIO_113_P9 GPIO_114_N9 GPIO_115_N11 GPIO_116_L16 GPIO_117_K16 GPIO_118_R16 GPIO_119_L15 GPIO_120_P15 GPIO_121_P16 GPIO_122_R14 GPIO_123_N16 GPIO_124_N15 GPIO_125_P14 GPIO_126_L14 GPIO_127_N14 GPIO_128_M10 GPIO_129_L13 GPIO_130_J16 GPIO_131_K15 GPIO_132_J13 GPIO_133_J14 GPIO_210_F14 GPIO_211_G16 GPIO_212_G15 IRQ_FPGA VCC_3V3_1 VCC_3V3_2 VCC_3V3_3 VCC_5V_1 VCC_5V_2
net class CLAVIER: AU_STATUS GND GPIO_1_IN0_T9 GPIO_1_IN1_R9 GPIO_10_F13 GPIO_11_T15 LED_CLAVIER NRST NRST_NUCLEO PA12 PC5 PC6 PC8 PC9 SW_1 SW_2 SW_3 SW_TIRETTE
net class CAPT_INT: 3L_CAP CAP_#A CAP_#B CAP_#C CaptTOR_7 CaptTOR_8 CaptTOR_9 CaptTOR_10 CaptTOR_11 CaptTOR_12 GND GPIO_12_T14 GPIO_13_T13 GPIO_14_R13 GPIO_15_T12 GPIO_16_R12 GPIO_211_G16 NetC278_1 NetC281_1 NetC282_1 NetC284_1 NetC287_1 NetC288_1 SigCAPT_7 SigCAPT_8 SigCAPT_9 SigCAPT_10 SigCAPT_11 SigCAPT_12
net class CAPT_EXT: 3L 3L_CAP CaptTOR_1 CaptTOR_2 CaptTOR_3 CaptTOR_4 CaptTOR_5 CaptTOR_6 GND GPIO_2_IN0_E15 GPIO_2_IN1_E16 GPIO_2_IN2_M16 GPIO_20_A14 GPIO_210_F14 GPIO_212_G15 PA0 PA1
net class CAN: 5L CAN_Rx CAN_Tx CANH CANL GND NetC213_1 NetU201_5 PB8 PB9
net class ALIM_OUT: 5L 5L_EXT_1 5L_EXT_2 5L_EXT_3 5L_EXT_4 EXT_IO_1 EXT_IO_2 EXT_IO_3 EXT_IO_4 EXT_IO_5 EXT_IO_6 EXT_IO_7 EXT_IO_8 EXT_IO_9 EXT_IO_10 GND
net class ALIM_IN: 5L 5P GND
net class 3L: 3L 5L GND NetC228_1 NetC229_1
net class 3L_ADC: 3L_ADC 5L GND NetC225_1 NetC226_1
differential pair USB: +USB_P -USB_N

## Components (designator, comment, footprint, x,y, rotation, side; value= is the part's Value field where it differs from the comment)
H3 "Comment" Tooling_hole_JLCPCB 50,188 r0 top

## Footprints (in the part's own frame and the unit in brackets; to place one, negate y for a bottom-side part, rotate by r counter-clockwise, add the part's x,y. Pads: shape width x height; smd on the part's side, far side on the other; paste and mask are expansions set on the pad)
Tooling_hole_JLCPCB [mm]
  round 1 hole 1.152 unplated paste+1.152 mask+0.148: 1(0,0)

## Free pads (board coordinates)
  round 0 hole 0.5 unplated: 2(6.125,100) 2(6.125,102) 2(6.125,172) 2(6.125,174) 2(6.875,100) 2(6.875,102) 2(6.875,172) 2(6.875,174) 2(7.625,100) 2(7.625,102) 2(7.625,172) 2(7.625,174) 2(8.375,102) 2(8.375,174) 2(8.375,100) 2(8.375,172) 2(9.125,100) 2(9.125,102) 2(9.125,172) 2(9.125,174) 2(9.875,100) 2(9.875,102) 2(9.875,172) 2(9.875,174) 2(10.625,100) 2(10.625,102) 2(10.625,172) 2(10.625,174) 2(11.375,100) 2(11.375,102) 2(11.375,172) 2(11.375,174) 2(26,177.625) 2(26,179.125) 2(26,179.875) 2(26,180.625) 2(26,181.375) 2(26,182.125) 2(26,185.625) 2(26,187.125) 2(26,187.875) 2(26,178.375) 2(26,182.875) 2(26,186.375) 2(28,179.875) 2(28,180.625) 2(28,181.375) 2(28,177.625) 2(28,178.375) 2(28,179.125) 2(28,182.125) 2(28,182.875) 2(28.125,100) 2(28.125,102) 2(28.875,100) 2(28.875,102) 2(29.625,102) 2(29.625,100) 2(30.125,172) 2(30.125,174) 2(30.125,184.6) 2(30.375,100) 2(30.375,102) 2(30.875,172) 2(30.875,174) 2(30.875,184.6) 2(31.125,100) 2(31.125,102) 2(31.625,172) 2(31.625,174) 2(31.625,184.6) 2(31.875,100) 2(31.875,102) 2(32.375,174) 2(32.375,172) 2(32.375,184.6) 2(32.625,100) 2(32.625,102) 2(33.125,172) 2(33.125,174) 2(33.125,184.6) 2(33.375,100) 2(33.375,102) 2(33.875,172) 2(33.875,174) 2(33.875,184.6) 2(34.625,172) 2(34.625,174) 2(34.625,184.6) 2(35.375,172) 2(35.375,174) 2(35.375,184.6) 2(46.5,176.625) 2(46.5,177.375) 2(46.5,178.125) 2(46.5,179.625) 2(46.5,180.375) 2(46.5,181.125) 2(46.5,181.875) 2(46.5,178.875) 2(49.625,100) 2(49.625,102) 2(49.625,172) 2(50.375,100) 2(50.375,102) 2(50.375,172) 2(51.125,102) 2(51.125,100) 2(51.125,172) 2(51.875,100) 2(51.875,102) 2(51.875,172) 2(52.625,100) 2(52.625,102) 2(52.625,172) 2(53.375,100) 2(53.375,102) 2(53.375,172) 2(53.5,183.875) 2(53.5,184.625) 2(53.5,185.375) 2(53.5,181.625) 2(53.5,182.375) 2(53.5,183.125) 2(53.5,186.125) 2(53.5,186.875) 2(54.125,100) 2(54.125,102) 2(54.125,172) 2(54.875,100) 2(54.875,102) 2(54.875,172) 2(65.125,178.9) 2(65.625,172) 2(65.875,178.9) 2(66.375,172) 2(66.625,178.9) 2(67.125,172) 2(67.375,178.9) 2(67.875,172) 2(68.125,178.9) 2(68.625,172) 2(68.875,178.9) 2(69.375,172) 2(69.625,178.9) 2(70.125,172) 2(70.375,178.9) 2(70.625,100) 2(70.625,102) 2(70.875,172) 2(71.375,100) 2(71.375,102) 2(72,180.625) 2(72,181.375) 2(72,182.125) 2(72,183.625) 2(72,184.375) 2(72,185.125) 2(72,185.875) 2(72,182.875) 2(72.125,100) 2(72.125,102) 2(72.875,100) 2(72.875,102) 2(73.625,102) 2(73.625,100) 2(74,180.625) 2(74,181.375) 2(74,184.375) 2(74,185.125) 2(74,185.875) 2(74,182.125) 2(74,182.875) 2(74,183.625) 2(74,177.125) 2(74,175.625) 2(74,176.375) 2(74,177.875) 2(74.375,100) 2(74.375,102) 2(75.125,100) 2(75.125,102) 2(75.875,100) 2(75.875,102) 2(89.125,172) 2(89.125,174) 2(89.125,100) 2(89.125,102) 2(89.875,172) 2(89.875,174) 2(89.875,100) 2(89.875,102) 2(90.625,172) 2(90.625,174) 2(90.625,100) 2(90.625,102) 2(91.375,172) 2(91.375,174) 2(91.375,100) 2(91.375,102) 2(92.125,174) 2(92.125,172) 2(92.125,102) 2(92.125,100) 2(92.875,172) 2(92.875,174) 2(92.875,100) 2(92.875,102) 2(93.625,172) 2(93.625,174) 2(93.625,100) 2(93.625,102) 2(94.375,172) 2(94.375,174) 2(94.375,100) 2(94.375,102)

## Nets (pads, with @x,y where several pads share a name; then routed paths per layer and width w, separated by ;. In a path a pad name is that pad's centre, name@x,y a point inside that pad or via, vN(x,y) a via of type N, cw(c..) or ccw(c..) an arc to the next point about the centre after c; other vN are vias at no path point)
3L: 
3L_ADC: 
3L_CAP: 
3L_FT232: 
3L_MOT: 
3V3_FT232: 
5L: 
5L_CAP: 
5L_DE0: 
5L_DYNA: 
5L_ENC_PROP: 
5L_EXT_1: 
5L_EXT_2: 
5L_EXT_3: 
5L_EXT_4: 
5L_QEI_MOT: 
5L_QEI_PROP: 
5P: 
5P_SERVO_A: 
5P_SERVO_B: 
5P_SERVO_C: 
+3V3: 
+5V: 
ADC_IN_1: 
ADC_IN_2: 
ANALOG_IN0: 
ANALOG_IN1: 
ANALOG_IN2: 
ANALOG_IN3: 
ANALOG_IN4: 
ANALOG_IN5: 
ANALOG_IN6: 
ANALOG_IN7: 
AU_STATUS: 
AVDD: 
BOOT0: 
CAN_Rx: 
CAN_Tx: 
CANH: 
CANL: 
CAP_#A: 
CAP_#B: 
CAP_#C: 
CaptTOR_1: 
CaptTOR_2: 
CaptTOR_3: 
CaptTOR_4: 
CaptTOR_5: 
CaptTOR_6: 
CaptTOR_7: 
CaptTOR_8: 
CaptTOR_9: 
CaptTOR_10: 
CaptTOR_11: 
CaptTOR_12: 
DATA_DYNA: 
DYNA_DIR: 
DYNA_RX: 
DYNA_TX: 
E5V: 
ENC_M1_A: 
ENC_M1_B: 
ENC_M1_CLK1: 
ENC_M1_CLK2: 
ENC_M1_DAT1: 
ENC_M1_DAT2: 
ENC_M2_A: 
ENC_M2_B: 
ENC_M2_CLK1: 
ENC_M2_CLK2: 
ENC_M2_DAT1: 
ENC_M2_DAT2: 
ENC_P1_A: 
ENC_P1_B: 
ENC_P2_A: 
ENC_P2_B: 
EXT_IO_1: 
EXT_IO_2: 
EXT_IO_3: 
EXT_IO_4: 
EXT_IO_5: 
EXT_IO_6: 
EXT_IO_7: 
EXT_IO_8: 
EXT_IO_9: 
EXT_IO_10: 
FPGA_Rx: 
FPGA_Tx: 
FT232_Rx: 
FT232_Tx: 
GND: 
GPIO_00_D3: 
GPIO_0_IN0_A8: 
GPIO_0_IN1_B8: 
GPIO_01_C3: 
GPIO_1_IN0_T9: 
GPIO_1_IN1_R9: 
GPIO_02_A2: 
GPIO_2_IN0_E15: 
GPIO_2_IN1_E16: 
GPIO_2_IN2_M16: 
GPIO_03_A3: 
GPIO_04_B3: 
GPIO_05_B4: 
GPIO_06_A4: 
GPIO_07_B5: 
GPIO_08_A5: 
GPIO_09_D5: 
GPIO_010_B6: 
GPIO_10_F13: 
GPIO_011_A6: 
GPIO_11_T15: 
GPIO_012_B7: 
GPIO_12_T14: 
GPIO_013_D6: 
GPIO_13_T13: 
GPIO_014_A7: 
GPIO_14_R13: 
GPIO_015_C6: 
GPIO_15_T12: 
GPIO_016_C8: 
GPIO_16_R12: 
GPIO_017_E6: 
GPIO_018_E7: 
GPIO_18_T10: 
GPIO_019_D8: 
GPIO_19_R11: 
GPIO_20_A14: 
GPIO_020_E8: 
GPIO_21_B16: 
GPIO_021_F8: 
GPIO_22_C14: 
GPIO_022_F9: 
GPIO_23_C16: 
GPIO_023_E9: 
GPIO_024_C9: 
GPIO_24_C15: 
GPIO_025_D9: 
GPIO_25_D16: 
GPIO_26_D15: 
GPIO_026_E11: 
GPIO_27_D14: 
GPIO_027_E10: 
GPIO_028_C11: 
GPIO_28_F15: 
GPIO_029_B11: 
GPIO_29_F16: 
GPIO_030_A12: 
GPIO_031_D11: 
GPIO_032_D12: 
GPIO_033_B12: 
GPIO_110_P11: 
GPIO_111_R10: 
GPIO_112_N12: 
GPIO_113_P9: 
GPIO_114_N9: 
GPIO_115_N11: 
GPIO_116_L16: 
GPIO_117_K16: 
GPIO_118_R16: 
GPIO_119_L15: 
GPIO_120_P15: 
GPIO_121_P16: 
GPIO_122_R14: 
GPIO_123_N16: 
GPIO_124_N15: 
GPIO_125_P14: 
GPIO_126_L14: 
GPIO_127_N14: 
GPIO_128_M10: 
GPIO_129_L13: 
GPIO_130_J16: 
GPIO_131_K15: 
GPIO_132_J13: 
GPIO_133_J14: 
GPIO_210_F14: 
GPIO_211_G16: 
GPIO_212_G15: 
I2C1_SCL: 
I2C1_SDA: 
I2C2_SCL: 
I2C2_SDA: 
IRQ_FPGA: 
LED_CLAVIER: 
MOT1_CS: 
MOT1_DIR: 
MOT1_PWM: 
MOT2_CS: 
MOT2_DIR: 
MOT2_PWM: 
nDATA_DYNA: 
NetC213_1: 
NetC225_1: 
NetC226_1: 
NetC228_1: 
NetC229_1: 
NetC278_1: 
NetC281_1: 
NetC282_1: 
NetC284_1: 
NetC287_1: 
NetC288_1: 
NetD203_1: 
NetD203_2: 
NetD204_1: 
NetD204_2: 
NRST: 
NRST_NUCLEO: 
PA0: 
PA1: 
PA2: 
PA3: 
PA4: 
PA8: 
PA9: 
PA10: 
PA11: 
PA12: 
PA13: 
PA14: 
PA15: 
PB0: 
PB1: 
PB1_SPARE: 
PB2: 
PB3: 
PB4: 
PB5: 
PB6: 
PB7: 
PB8: 
PB9: 
PB10: 
PB11: 
PB12: 
PB13: 
PB14: 
PB15: 
PC0: 
PC1: 
PC2: 
PC3: 
PC4: 
PC5: 
PC6: 
PC7: 
PC8: 
PC9: 
PC10: 
PC11: 
PC12: 
PC13: 
PC14: 
PC15: 
PD2: 
PD8: 
PF0: 
PF1: 
PF4: 
PF5: 
PF6: 
PF7: 
PROP_DIR1: 
PROP_DIR2: 
PROP_EN: 
PROP_S1-Rx: 
PROP_S2-Tx: 
PWR_Servo_1: 
PWR_Servo_2: 
PWR_Servo_3: 
PWR_Servo_4: 
QEI_M1_A: 
QEI_M1_B: 
QEI_M2_A: 
QEI_M2_B: 
QEI_P1_A: 
QEI_P1_B: 
QEI_P2_A: 
QEI_P2_B: 
Servo_1: 
Servo_2: 
Servo_3: 
Servo_4: 
Servo_5: 
Servo_6: 
Servo_7: 
Servo_8: 
Servo_9: 
Servo_10: 
Servo_11: 
Servo_12: 
Servo_Curr_1: 
Servo_Curr_2: 
Servo_Curr_3: 
Servo_Curr_4: 
SigCAPT_7: 
SigCAPT_8: 
SigCAPT_9: 
SigCAPT_10: 
SigCAPT_11: 
SigCAPT_12: 
SPI1_MISO: 
SPI1_MOSI: 
SPI1_SCK: 
SPI2_CS_1: 
SPI2_MISO: 
SPI2_MOSI: 
SPI2_SCK: 
SPI3_CS_1: 
SPI3_MISO: 
SPI3_MOSI: 
SPI3_SCK: 
SSI_M1_CLK1: 
SSI_M1_CLK2: 
SSI_M1_DAT1: 
SSI_M1_DAT2: 
SSI_M2_CLK1: 
SSI_M2_CLK2: 
SSI_M2_DAT1: 
SSI_M2_DAT2: 
STM_Rx: 
STM_Tx: 
SW_1: 
SW_2: 
SW_3: 
SW_TIRETTE: 
ToF_DS_1: 
ToF_DS_2: 
ToF_DS_3: 
ToF_DS_4: 
U5V: 
USB_N: 
USB_P: 
VBAT: 
VCC_3V3_1: 
VCC_3V3_2: 
VCC_3V3_3: 
VCC_5V_1: 
VCC_5V_2: 
VCC_EXT_1: 
VCC_EXT_2: 
VDD: 
VIN: 
VUSB: 
pads on no net: H3.1

## Polygon pours and split planes (outlines as drawn)
GND on Ground Plane (split plane): 993 vertices, not listed, extent 0.51,0.51 99.49,188.99
3L on Power Plane (split plane): 993 vertices, not listed, extent 0.51,0.51 99.49,188.99

## Keep-outs
Keep-Out Layer:
  drawing of 2408 lines, arcs and shapes, not listed

## Silkscreen, mask and mechanical layers (free items; w line width, h text height)
Top Overlay:
  text "JLCJLCJLCJLC" at 47.75,188.75 h1.5 r180
  text "Snap" at 28.477,187.735 h1 r205
  text "Snap" at 31.001,185.402 h1
  text "Snap" at 52.5,183.5 h1 r90
  text "Snap" at 73.198,182.001 h1 r90
  text "Snap" at 26.802,180.999 h1 r270
  text "Snap" at 47.302,180.499 h1 r270
  text "Snap" at 69.499,178.098 h1 r180
  text "Snap" at 71.796,175.924 h1 r25
  text "Snap" at 7.501,172.802 h1
  text "Snap" at 31.501,172.802 h1
  text "Snap" at 51.001,172.802 h1
  text "Snap" at 67.501,172.802 h1
  text "Snap" at 91.001,172.802 h1
  text "Snap" at 7.501,100.802 h1
  text "Snap" at 29.501,100.802 h1
  text "Snap" at 51.001,100.802 h1
  text "Snap" at 72.001,100.802 h1
  text "Snap" at 90.501,100.802 h1
Bottom Construction:
  drawing of 211 lines, arcs and shapes, not listed

## Dimensions
3.5,0 to 3.5,189.5 on Dimension

## Panel: embedded boards
"..\16-Carte_Herse_2020\Carte_Herse_2020-4L.PcbDoc" at 74,174, 1 rows x 1 columns, spacing 63.5 x 38.1, rotation 0
"..\17-Carte_OPB\Carte_OPB-4L.PcbDoc" at 53.5,178.9, 1 rows x 1 columns, spacing 63.5 x 38.1, rotation 0
"..\17-Carte_OPB\Carte_OPB-4L.PcbDoc" at 28,174, 1 rows x 1 columns, spacing 63.5 x 38.1, rotation 0
"..\16-Carte_Herse_2020\Carte_Herse_2020-4L.PcbDoc" at 0,174, 1 rows x 1 columns, spacing 63.5 x 38.1, rotation 0
"..\15-Carte_Mere\Carte_Mere.PcbDoc" at 0,102, 1 rows x 1 columns, spacing 63.5 x 38.1, rotation 0
"..\14-Carte_Alim\Carte_Alim-4L.PcbDoc" at 0,0, 1 rows x 1 columns, spacing 63.5 x 38.1, rotation 0